# Altium PCB PCB方案验证板  12V5A 60Wascii2.PcbDoc (part 2 of 2)
Units mm, origin at the board's own origin, x right, y up, seen from the top; angles counter-clockwise.
Board outline 99 x 45 mm, 2 copper layers (Top Layer, Bottom Layer); 59 components, 34 nets, 205 pads, 4 vias.
Unrouted connection lines stored in the file: 2.
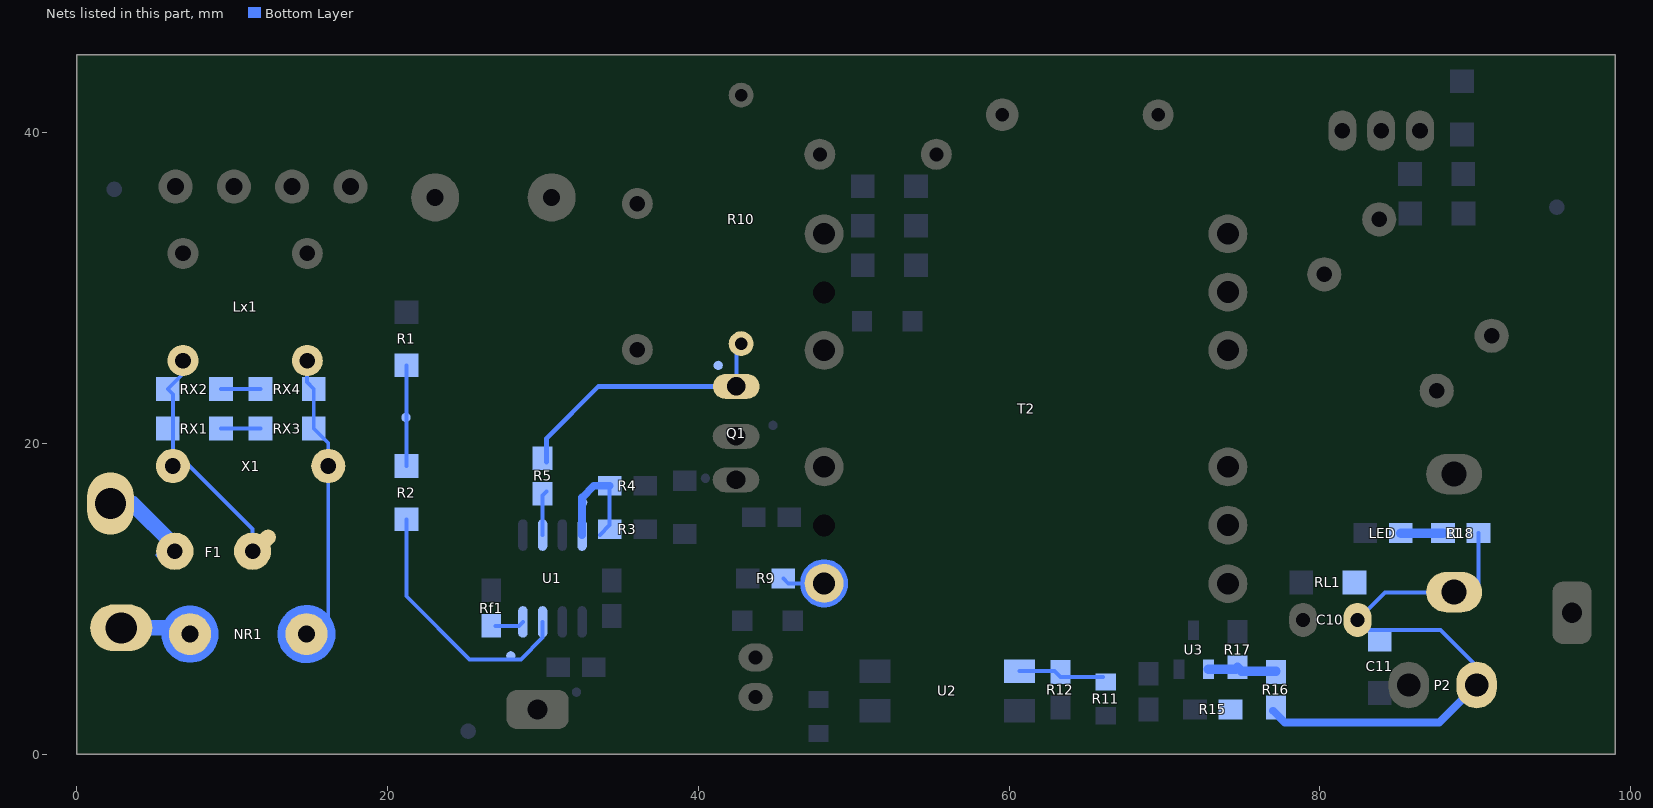
[diagram p2: the nets of this part, all layers, seen from the top]

## Via types
v1: diameter 3.5, hole 3.5, Top Layer to Bottom Layer, 4 vias

## Nets (pads, with @x,y where several pads share a name; then routed paths per layer and width w, separated by ;. In a path a pad name is that pad's centre, name@x,y a point inside that pad or via, vN(x,y) a via of type N, cw(c..) or ccw(c..) an arc to the next point about the centre after c; other vN are vias at no path point) (continued)
NetF1_1: F1.1 F1.@5.753,12.481 pad.1@2.159,16.129 | length 8
  Bottom Layer w0.254: F1.1@5.178,12.827 F1.1@5.753,12.252
  Bottom Layer w1: pad.1@2.159,14.732 pad.1@2.159,16.129 3.556,16.129 6.303,13.382 F1.1@6.303,13.056 F1.1@6.303,12.827
NetF1_2: F1.2 F1.@11.878,13.531 Lx1.3 RX1.1 RX2.1 X1.1 | length 16.1
  Bottom Layer w0.254: Lx1.3@6.795,25.633 6.795,24.448 RX2.1@5.842,23.495 6.176,23.161 X1.1@6.176,18.542 7.239,18.542 11.303,14.478 F1.2@11.303,13.056 F1.@11.303,12.827
NetLED1_1: LED.2 R18.1 | length 2.7
  Bottom Layer w0.6: LED.2@85.2,14.224 R18.1@87.925,14.224
NetNR1_1: Lx1.1 NR1.1 RX3.2 RX4.2 X1.2 | length 26.9
  Bottom Layer w0.254: Lx1.1@14.795,25.633 14.795,23.94 RX4.2@15.24,23.495 RX3.2@15.24,20.955 16.176,20.019 X1.2@16.176,18.542 16.176,7.914
  Bottom Layer w1: 16.148,7.722 ccw(c14.775,7.722) 16.148,7.722
NetNR1_2: NR1.2 pad.1@2.85,8.128 | length 11.2
  Bottom Layer w1: pad.1@2.85,8.128 5.588,8.128 ; NR1.2@8.616,7.722 ccw(c7.275,7.722) NR1.2@8.616,7.722
NetQ1_S: pad.6@41.275,25.019 Q1.S R5.1 R10.2 | length 18.3
  Bottom Layer w0.254: Q1.S@42.438,23.665 42.438,26.309 R10.2@42.799,26.67
  Bottom Layer w0.3: R5.1@30.226,18.796 30.226,20.32 33.571,23.665 Q1.S@42.438,23.665
NetR1_1: pad.6@21.175,21.666 R1.1 R2.2 | length 6.5
  Bottom Layer w0.254: R2.2@21.209,18.542 R1.1@21.209,25.019
NetR2_1: pad.6@27.925,6.325 R2.1 U1.3 | length 17
  Bottom Layer w0.254: R2.1@21.209,15.113 21.209,10.16 25.273,6.096 28.575,6.096 29.972,7.493 U1.3@29.972,8.509
NetR3_2: pad.6@32.55,16.205 R3.2 R4.2 U1.8 | length 7.9
  Bottom Layer w0.254: R3.2@33.655,14.097 34.29,14.732 R4.2@34.29,17.272
  Bottom Layer w0.5: U1.8@32.512,14.097 32.512,16.51 33.274,17.272 R4.2@34.29,17.272
NetR5_2: R5.2 U1.6 | length 2.9
  Bottom Layer w0.254: U1.6@29.972,14.097 29.972,16.637 R5.2@30.226,16.891
NetR9_1: R9.1 T2.6 | length 9.6
  Bottom Layer w0.254: R9.1@45.466,11.303 45.781,10.988 47.041,10.988 T2.6@48.087,10.988 ; T2.6@47.877,10.795 T2.6@48.041,10.959
  Bottom Layer w1: T2.6@47.041,10.988 cw(c48.087,10.988) 49.133,10.988 cw(c48.087,10.988) T2.6@47.041,10.988
NetR11_1: R11.1 R12.2 U2.A | length 5.6
  Bottom Layer w0.254: U2.A@60.657,5.334 62.919,5.334 63.3,4.953 R11.1@66.05,4.953
NetR15_1: R15.1 R16.1 R17.2 U3.R | length 4.5
  Bottom Layer w0.6: U3.R@72.825,5.461 74.573,5.461 R17.2@74.7,5.588 74.954,5.334 R16.1@77.175,5.334
NetRf1_1: Rf1.1 U1.4 | length 1.9
  Bottom Layer w0.254: Rf1.1@26.924,8.255 28.448,8.255 U1.4@28.702,8.509
NetRX1_2: RX1.2 RX3.1 | length 2.5
  Bottom Layer w0.254: RX1.2@9.271,20.955 RX3.1@11.811,20.955
NetRX2_2: RX2.2 RX4.1 | length 2.5
  Bottom Layer w0.254: RX2.2@9.271,23.495 RX4.1@11.811,23.495
VCC: C10.1 C11.1 L1.2 P2.VCC R16.2 R18.2 RL1.2 | length 35.6
  Bottom Layer w0.254: L1.2@89.022,10.8 88.636,10.414 84.201,10.414 C10.1@82.423,8.636 82.423,8.001 87.757,8.001 P2.VCC@90.805,4.953 ; L1.2@90.211,10.795 R18.2@90.211,14.224
  Bottom Layer w0.5: R16.2@76.99,2.783 77.741,2.032 87.681,2.032 P2.VCC@90.094,4.445
pads on no net: RN.1 T2.2 T2.5 U1.5 U2.C
copper on no net: | length 2055.6
  Bottom Layer w0.3: 28.525,10.972 31.446,10.972 31.8,10.618 ; 29.591,16.383 29.591,16.129 29.972,15.748 30.48,16.256 ; 29.591,19.685 30.226,20.32 29.845,19.939 29.845,19.558 ; 29.845,16.383 29.845,14.605 29.972,14.478 ; 29.845,19.304 29.845,19.558 ; 29.972,14.224 30.099,14.351 30.099,16.383 ; 30.226,18.796 30.48,19.05 30.48,20.574 ; 30.226,19.939 29.845,19.558 ; 30.861,5.334 31.75,4.445 ; 31.115,5.334 31.115,5.08 31.305,4.889 ; 32.475,25.527 33.059,25.527 ccw(c33.059,28.593) 35.227,26.425 35.675,26.873 ; 33.075,37.592 33.23,37.592 34.5,36.322 ; 33.125,37.973 33.224,37.973 34.875,36.322 ; 33.3,16.891 33.642,16.891 34.15,16.383 34.198,16.383 34.325,16.256 34.325,16.441 34.775,16.891 ; 33.725,14.986 34.175,15.436 34.325,15.436 ; 33.899,25.527 33.275,25.527 34.642,25.527 ; 34.25,25.629 34.43,25.629 35.675,26.873 ; 34.325,15.621 34.325,15.436 ; 34.775,14.986 34.325,15.436 ; 34.775,25.629 34.775,25.712 35.275,26.213 ; 36.85,25.493 36.85,26.543 36.52,26.873 35.675,26.873 ; 37.125,16.891 37.76,17.526 37.95,17.526 ; 39.725,17.145 39.746,17.145 40,17.399 ; 39.751,23.665 40.175,23.665 41.021,24.511 ; 40.894,24.003 40.556,23.665 40.386,23.665 ; 41.148,23.368 40.851,23.665 40.386,23.665 ; 43.307,22.987 41.275,22.987 40.597,23.665 40.386,23.665 ; 43.425,16.256 43.933,15.748 44.05,15.748 43.434,16.364 43.434,17.018 ; 44.85,11.049 44.85,10.768 44.95,10.668 47.75,10.668 47.877,10.795 ; 45.75,1.706 46.183,1.706 47,0.889 48.225,0.889 ; 46.075,11.303 46.634,11.303 47.65,12.319 48.538,12.319 49.3,11.557 49.3,10.504 48.575,9.779 47.643,9.779 46.5,10.922 ; 46.1,14.732 46.625,14.732 46.625,16.526 ; 47.05,1.143 46.6,1.593 46.6,1.651 ; 47.2,1.27 46.819,1.651 46.6,1.651 ; 47.4,1.27 47.019,1.651 46.6,1.651 ; 47.875,4.445 47.875,4.48 48.475,5.08 ; 47.875,4.953 47.875,3.733 47.925,3.683 ; 48.125,3.683 48.125,5.209 48.25,5.334 ; 48.125,4.953 50.821,4.953 51.075,5.207 ; 49.4,2.413 49.511,2.413 ; 49.975,5.207 50.483,5.715 50.875,5.715 ; 50.175,2.765 50.204,2.794 50.7,2.794 50.446,2.54 49.95,2.54 50.712,3.302 50.85,3.302 ; 51.225,3.175 51.098,3.302 50.4,3.302 49.511,2.413 ; 52.2,2.159 50.325,2.159 50.071,2.413 49.511,2.413 ; 84.808,16.383 87.6,16.383 ; 85.8,17.272 86.175,16.897 86.175,16.891 85.921,16.637 84.9,16.637 ; 86.525,18.415 86.124,18.415 84.6,16.891 84.909,16.891 85.925,17.907 85.925,17.662 84.9,16.637 ; 86.925,19.304 86.713,19.304 84.3,16.891 84.3,15.693 84.507,15.486 92.7,15.486 ; 88.525,25.636 88.525,25.586 89.6,24.511 ; 88.8,25.527 88.99,25.527 89.625,24.892 ; 89.175,25.342 90.042,25.342 90.1,25.4 ; 89.375,24.384 88.2,25.559 88.2,25.654 88.218,25.636 90.85,25.636 ; 89.375,25.4 89.444,25.4 89.825,25.019 ; 84.9,16.637 85.775,17.512 86.475,16.812 86.475,16.637 84.9,16.637
  Bottom Layer w0.33: 63.3,2.667 63.684,2.667 64.573,3.556 67.549,3.556 68.5,4.507 68.5,4.83 68.75,5.08
  Bottom Layer w0.4: 16.637,36.703 17.145,36.195 18.288,36.195 19.05,36.957 ; 27.305,10.033 27.432,10.033 27.94,10.541 ; 33.274,4.718 35.579,2.413 44.625,2.413 51,2.413
  Bottom Layer w0.5: 5.325,36.83 5.325,40.235 9.286,44.196 11,44.196 ; 9.375,42.164 27.824,42.164 29.525,40.463 29.525,36.576 ; 9.85,42.545 27.644,42.545 28.025,42.164 ; 10.6,14.478 10.6,13.656 10.025,13.081 10.025,12.113 10.2,11.938 10.371,11.938 10.625,11.684 11.725,11.684 11.725,11.694 12.35,12.319 ; 10.8,14.478 10.8,13.954 9.8,12.954 9.8,12.255 10.625,11.43 11.873,11.43 12,11.557 12,11.617 12.575,12.192 12.575,14.84 12.175,15.24 ; 12.025,15.621 12.525,15.121 ; 13.425,36.957 13.425,31.742 13.925,31.242 14.9,31.242 ; 14.325,7.188 15.011,6.502 15.787,6.502 17.25,7.965 17.25,18.923 15.625,20.548 15.625,21.209 ; 14.55,19.812 14.55,18.753 15.65,17.653 ; 20.955,15.113 20.955,10.16 25.019,6.096 28.575,6.096 29.972,7.493 29.972,8.255 ; 21.463,10.033 21.463,15.367 ; 21.463,10.287 21.463,9.906 25.273,6.096 ; 21.463,10.541 25.908,6.096 ; 24.075,36.195 24.075,31.671 24.25,31.496 ; 24.384,31.306 24.575,31.115 ; 26.925,43.18 27.276,43.18 28.8,41.656 ; 31.496,10.795 31.623,10.795 33.147,9.271 ; 32.512,9.525 34.544,9.525 34.798,9.271 ; 32.512,14.097 32.512,16.256 ; 32.65,39.624 33.306,39.624 35.55,41.868 ; 32.766,37.592 33.274,37.592 ; 32.893,6.858 33.655,6.096 ; 32.893,7.62 33.782,8.509 ; 33.274,4.718 33.274,5.588 ; 33.275,39.878 33.275,39.91 35.275,41.91 ; 33.375,38.1 33.375,39.693 36.1,42.418 ; 33.401,11.874 34.734,11.874 ; 33.528,5.715 34.29,5.715 36.322,3.683 44.069,3.683 ; 33.528,6.223 34.036,6.223 36.195,4.064 ; 33.528,17.272 34.29,17.272 ; 33.625,42.545 33.625,42.817 34.75,43.942 58.42,43.942 60.579,41.783 ; 33.675,35.832 33.675,40.141 ; 33.782,5.715 33.909,5.715 35.56,4.064 ; 34.163,10.922 33.21,11.874 33.147,11.874 33.465,11.874 34.29,11.049 ; 34.671,10.922 36.068,10.922 40.513,6.477 43.434,6.477 ; 34.875,41.783 57.912,41.783 58.575,41.12 ; 35.306,4.064 44.196,4.064 ; 37.2,30.226 37.361,30.226 ; 39.497,17.907 41.021,17.907 41.402,18.288 43.307,18.288 43.688,17.907 43.688,17.272 43.434,17.018 41.402,17.018 40.832,17.588 40.64,17.588 ; 42.164,6.477 42.291,6.477 43.18,5.588 ; 43.942,3.302 35.687,3.302 33.401,5.588 33.274,5.588 ; 44.069,19.812 41.402,19.812 41.021,20.193 41.021,20.828 41.275,21.082 44.704,21.082 ; 44.323,3.683 35.56,3.683 33.655,5.588 33.274,5.588 ; 44.831,5.969 46.482,7.62 46.482,8.509 ; 44.831,6.604 45.72,7.493 45.72,8.763 ; 45.085,6.477 45.974,7.366 45.974,8.382 ; 45.276,7.048 43.624,7.048 42.926,6.35 42.926,6.223 42.926,5.842 43.434,5.334 44.831,5.334 46.609,7.112 46.609,8.382 ; 47.675,3.882 47.675,4.934 48.075,5.334 51.357,5.334 ; 48.044,32.512 48.425,32.893 ; 49.911,19.685 60.579,30.353 60.579,40.767 ; 53.425,27.229 53.476,27.178 ; 55.25,39.522 55.232,39.522 53.2,37.49 53.2,27.454 53.476,27.178 ; 55.875,38.786 55.875,38.034 54.925,37.084 54.925,27.578 54.525,27.178 53.476,27.178 ; 57.785,43.561 58.801,43.561 60.579,41.783 ; 59.817,28.956 60.579,29.718 60.579,30.861 ; 59.817,40.005 60.579,40.767 ; 60.198,41.275 60.325,41.148 60.325,30.099 ; 61.1,5.334 63.254,5.334 63.3,5.288 ; 61.2,5.08 63.45,5.08 66.371,5.08 66.625,4.826 ; 61.225,2.667 63.3,2.667 ; 61.25,3.048 63.523,3.048 63.65,2.921 ; 61.5,2.286 61.881,2.667 62.2,2.667 ; 62.325,3.048 62.706,3.429 62.875,3.429 ; 64.725,5.08 65.115,5.08 65.75,4.445 ; 66.4,2.667 66.4,1.651 67.035,1.016 67.075,1.016 ; 66.425,2.261 66.507,2.261 67.625,1.143 ; 66.425,2.388 66.425,2.017 67.35,1.092 ; 66.625,2.54 66.625,1.426 66.7,1.351 ; 67.8,1.016 66.75,1.016 65.8,1.966 65.8,2.54 65.575,2.315 65.575,1.905 66.337,1.143 66.4,1.143 66.654,0.889 91.8,0.889 92.65,1.739 ; 68.85,3.302 69.567,3.302 70.075,2.794 69.806,2.794 69.425,2.413 ; 68.975,2.875 71.964,2.875 ; 69.3,5.461 70.925,5.461 70.087,5.461 69.325,4.699 ; 70.525,2.875 70.94,2.875 ; 71.35,3.175 71.05,2.875 70.94,2.875 ; 71.825,7.747 74.573,7.747 74.7,7.874 ; 73.275,7.747 73.794,7.747 74.175,7.366 ; 73.4,5.461 73.908,5.969 74.475,5.969 ; 74.25,2.875 74.2,2.925 74.2,5.334 74.2,5.124 ; 74.5,4.064 73.484,5.08 72.975,5.08 ; 74.5,4.318 73.738,5.08 72.975,5.08 ; 74.625,4.699 74.2,5.124 ; 74.65,4.953 74.65,3.777 74.175,3.302 74.725,3.852 74.725,5.207 ; 75,7.493 78.373,7.493 78.5,7.62 ; 76.2,7.747 78.373,7.747 78.5,7.874 ; 76.5,7.874 77.973,7.874 78.1,8.001 ; 76.767,7.874 77.299,7.874 78.95,6.223 ; 76.99,2.783 76.99,2.367 77.325,2.032 79.3,2.032 ; 77.425,3.175 77.434,3.175 78.45,2.159 ; 77.475,2.794 77.475,2.659 77.975,2.159 ; 85,44.196 89.421,44.196 89.675,43.942 89.294,44.323 85.725,44.323 ; 86.725,41.148 88.503,42.926 88.975,42.926 ; 86.975,41.91 88.245,43.18 88.625,43.18 ; 87.125,42.494 89.573,42.494 89.7,42.621 89.7,43.717 89.45,43.967 ; 87.25,42.24 89.598,42.24 89.725,42.367 ; 87.475,42.266 89.623,42.266 89.725,42.367 ; 87.775,44.196 87.877,44.298 89.675,44.298 89.98,43.993 90.025,43.993 90.075,43.943 90.075,42.723 89.725,42.373 89.725,42.367 ; 88.25,2.601 88.25,5.698 88.775,6.223 ; 88.4,2.794 90.075,2.794 ; 89.725,42.499 89.725,42.367 ; 91.275,15.824 91.453,15.824 93.028,14.249 ; 92.425,15.935 92.425,15.674 93.875,14.224 ; 92.65,5.563 92.65,6.353 ; 92.65,14.959 92.65,1.739 ; 92.825,14.453 93.028,14.249 ; 93.2,16.187 93.2,14.73 ; 93.325,14.605 93.2,14.73 ; 93.65,15.494 93.65,15.666 94.875,16.891 ; 93.65,16.637 93.65,14.249 93.675,14.224 ; 93.7,15.113 93.7,15.174 95.925,17.399 ; 93.9,14.732 96.694,17.526 96.725,17.526 ; 94.375,17.526 93.875,17.026 93.875,14.097 ; 97.1,12.065 97.6,12.565 97.6,19.711 97.65,19.761 ; 97.58,17.802 93.875,14.097 ; 12.35,12.319 12.35,13.541 12.525,13.716 12.525,15.121 ; 12.35,12.319 12.525,12.494 12.525,15.121 ; 60.579,40.767 60.579,41.783 ; 70.94,2.875 71.275,2.54 70.94,2.875 ; 72.975,5.08 74.156,5.08 74.2,5.124 ; 92.65,1.739 92.65,1.76 93.1,2.21 93.1,14.63 93.2,14.73 ; 93.028,14.249 93.275,14.249 92.65,13.624 92.65,12.954 93.793,14.097 93.875,14.097
  Bottom Layer w0.56: 34.775,25.629 34.775,25.823
  Bottom Layer w0.6: 5.475,32.69 5.475,31.722 5.625,31.572 5.696,31.572 5.925,31.344 8.732,31.344 9.875,32.487 ; 13.65,25.298 13.65,26.726 13.975,27.051 15.749,27.051 15.8,27 15.845,27 16.175,26.67 16.175,18.919 15.925,18.669 ; 25.273,6.477 28.829,6.477 29.972,7.62 ; 26.543,10.16 26.543,12.446 ; 26.875,23.393 28.628,25.146 35.725,25.146 ; 26.924,11.557 26.924,23.876 28.575,25.527 36.322,25.527 ; 27.175,24.282 27.175,11.784 27.25,11.709 ; 28.575,10.541 26.924,10.541 27.178,10.795 28.829,10.795 ; 28.575,10.922 26.543,12.954 ; 30.734,5.969 31.242,6.477 31.242,6.604 ; 31.115,5.334 31.242,5.461 31.242,8.509 ; 32.512,9.525 31.496,10.541 27.94,10.541 26.543,11.938 26.543,12.954 ; 33.909,14.478 33.972,14.414 ; 34.29,14.732 34.29,17.272 ; 34.775,25.629 28.325,25.629 26.543,23.847 26.543,12.954 ; 36.576,14.478 38.8,14.478 ; 36.576,17.526 38.8,17.526 ; 39.116,17.588 42.483,17.588 ; 41.892,6.368 42.799,5.461 44.577,5.461 ; 42.291,6.477 42.799,6.985 44.704,6.985 ; 42.799,17.145 43.053,17.145 ; 45.085,11.557 47.625,11.557 48.26,10.922 ; 45.466,11.303 47.697,11.303 ; 45.466,15.748 46.101,16.383 46.101,16.501 ; 45.593,10.922 47.625,10.922 47.752,11.049 ; 45.847,11.557 47.244,11.557 47.625,11.938 48.641,11.938 49.022,11.557 49.022,10.541 48.514,10.033 47.818,10.033 46.863,10.988 ; 45.847,15.24 45.847,16.247 47.507,17.907 ; 46.228,14.986 46.228,16.129 47.752,17.653 ; 46.35,16.637 46.502,16.789 48.075,16.789 49.325,18.039 49.325,19.099 ; 46.95,17.221 46.95,18.672 47.125,18.847 47.125,18.933 47.775,19.583 49.374,19.583 49.425,19.634 ; 47.075,16.967 47.869,16.967 48.25,17.348 ; 47.2,26.975 48.267,28.042 50.825,28.042 ; 47.752,26.797 48.81,26.797 49.75,27.737 48.35,27.737 48.719,27.737 49.125,27.33 ; 48.089,27.864 48.521,28.296 50.8,28.296 50.825,28.271 50.825,27.711 ; 87.675,6.858 82.443,6.858 81.325,7.976 81.325,12.224 81.75,12.649 89.822,12.649 90,12.471
  Bottom Layer w0.61: 32.512,14.097 32.512,16.51 33.274,17.272 34.29,17.272 ; 33.02,16.891 34.417,16.891
  Bottom Layer w0.8: 5.842,38.862 5.842,37.846 5.461,37.465 5.461,36.576 5.842,36.195 6.477,36.195 7.112,36.83 7.112,39.624 ; 7.112,32.131 8.509,32.131 ; 7.371,31.882 10.033,34.544 ; 8.95,32.842 5.537,32.842 5.588,32.893 5.588,32.004 5.715,32.004 6.096,31.623 8.89,31.623 10.414,33.147 10.414,36.83 ; 13.783,33.545 13.783,32.064 14.478,31.369 15.494,31.369 16.129,32.004 16.129,32.766 15.621,33.274 14.859,33.274 14.16,33.972 14.16,36.639
  Bottom Layer w1: 1.905,17.018 1.905,16.764 6.096,12.573 ; 2.54,14.732 2.54,14.986 ; 2.54,15.367 2.667,15.367 ; 2.638,15.367 1.905,15.367 2.867,15.367 5.753,12.481 ; 2.921,7.62 2.794,7.493 2.667,7.493 2.921,7.239 5.35,7.239 ; 3.325,7.214 4.895,7.214 ; 3.429,14.224 1.651,14.224 0.762,15.113 0.762,17.018 1.651,17.907 2.286,17.907 6.54,13.652 ; 4.65,8.28 3.863,9.068 1.75,9.068 1.1,8.418 1.1,7.696 1.989,6.807 5.6,6.807 ; 5.675,12.559 5.915,12.319 6.675,12.319 7.175,12.819 7.175,13.64 6.438,14.376 5.775,14.376 ; 9.025,31.902 10.675,33.552 10.675,37.135 ; 9.025,33.096 9.7,33.771 9.7,37.186 ; 9.575,33.147 9.575,36.982 ; 13.425,36.957 13.425,32.1 13.8,31.725 ; 13.75,8.484 16.125,10.859 16.125,11.735 ; 14.15,35.052 14.15,34.396 15.45,33.096 ; 14.45,33.147 14.5,33.197 14.5,36.627 ; 14.795,24.765 14.478,24.765 13.843,25.4 13.843,26.035 14.605,26.797 15.24,26.797 15.621,26.416 15.621,22.479 ; 17.563,37.211 18.3,36.474 22.333,36.474 23.054,35.754 ; 19.75,36.728 20.37,36.728 22.3,34.798 ; 20.574,36.654 20.623,36.654 22.86,34.417 23.749,34.417 ; 21.209,18.542 21.209,25.019 ; 21.209,28.448 21.209,33.909 23.054,35.754 ; 22.294,34.163 22.675,33.782 ; 23.054,35.832 23.054,35.754 ; 23.9,33.274 23.9,32.776 26.45,30.226 ; 24.15,31.496 24.15,37.338 ; 27.05,12.116 27.05,12.045 28.3,10.795 ; 29.591,41.529 29.591,34.925 29.972,34.544 32.258,34.544 ; 30.861,37.338 32.258,35.941 32.258,34.925 ; 33.125,35.611 33.65,36.136 33.65,40.894 ; 33.224,37.973 33.224,37.763 35.275,35.712 ; 33.225,39.167 36.4,42.342 36.6,42.342 ; 33.274,37.338 33.274,36.83 33.655,36.449 ; 34.85,41.351 43.008,41.351 44.1,42.443 ; 35.814,36.322 36.449,36.322 36.957,35.814 36.957,35.052 36.576,34.671 ; 39.625,43.053 39.744,43.053 ; 41.402,25.654 42.672,26.924 43.053,26.924 43.561,26.416 43.561,23.622 43.307,23.368 41.91,23.368 41.148,24.13 41.148,25.4 42.291,26.543 ; 42.423,20.452 43.82,20.452 48.087,24.719 ; 42.876,8.839 42.876,10.998 ; 42.95,30.378 42.95,30.631 49.276,36.957 ; 43.075,29.947 43.075,30.134 49.258,36.317 ; 44.069,20.066 50.527,26.524 50.527,27.864 49.46,26.797 47.752,26.797 47.498,26.543 47.371,26.543 47.371,25.527 47.752,25.146 ; 44.323,21.082 48.514,25.273 ; 45.775,31.877 49.543,31.877 49.975,31.445 ; 46.15,31.267 46.353,31.064 50.85,31.064 50.925,31.139 50.925,37.795 49.477,39.243 47.825,39.243 ; 46.55,31.293 50.47,31.293 50.546,31.369 ; 47.3,38.71 47.3,34.386 49.225,32.461 ; 47.371,24.511 47.371,26.035 ; 47.498,10.795 47.879,11.176 ; 47.55,32.258 48.676,32.258 ; 48.05,38.481 48.05,36.062 48.4,35.712 ; 48.4,34.798 49.3,35.698 49.3,36.576 ; 48.55,38.1 48.55,35.86 48.85,35.56 ; 48.591,38.608 48.591,38.531 50.571,36.551 ; 49,38.913 49,38.586 50.375,37.211 ; 49.494,31.369 49.875,31.75 ; 53.625,28.55 54.375,29.3 54.375,36.703 55.525,37.853 55.525,38.532 ; 69.469,38.862 69.469,40.132 68.834,40.767 68.834,41.656 69.215,42.037 69.977,42.037 70.358,41.656 70.358,40.513 69.723,39.878 ; 69.65,25.4 69.65,24.201 73.15,20.701 ; 71.175,21.111 76.127,21.111 76.225,21.209 ; 71.775,21.717 76.098,21.717 76.225,21.59 ; 72.3,20.447 75.475,20.447 ; 73.9,20.752 74.189,20.752 78.075,24.638 ; 74.087,18.488 74.087,10.043 73.95,9.906 75.123,9.906 75.25,10.033 75.267,10.033 75.775,10.541 75.775,19.006 76.2,19.431 ; 74.2,28.448 74.2,31.629 ; 74.425,18.034 74.916,18.034 79.475,22.593 79.475,30.353 ; 74.55,33.02 74.55,33.076 81.225,39.751 ; 74.725,16.383 74.725,17.048 79.629,21.952 79.629,30.861 ; 77.575,22.987 77.575,30.3 79.025,31.75 ; 77.65,12.065 77.65,15.038 85.475,22.863 85.475,23.241 ; 78.375,8.722 79.075,9.422 79.075,14.732 ; 78.45,16.84 78.47,16.84 81.975,20.345 ; 78.5,7.874 77.65,8.724 77.65,17.822 77.65,17.882 80.875,21.107 86.25,21.107 86.275,21.082 ; 78.5,10.16 78.5,9.003 83.693,3.81 ; 78.625,8.89 79.007,8.89 ; 78.675,28.702 78.807,28.702 cw(c78.807,25.636) 80.975,27.804 ; 78.825,12.319 81.365,14.859 81.6,14.859 ; 78.875,11.811 81.034,13.97 81.9,13.97 ; 79.075,23.95 79.075,30.434 79.375,30.734 ; 79.075,30.023 cw(c79.075,29.158) 79.687,29.769 82.075,27.381 ; 79.175,8.382 79.35,8.557 79.35,14.859 ; 79.2,13.97 79.327,14.097 80.125,14.097 82.787,14.097 83.175,14.485 83.175,17.526 ; 79.3,19.533 79.327,19.533 82.4,22.606 86.974,22.606 87.025,22.657 ; 79.35,29.718 81.275,29.718 ; 79.525,29.56 80.284,30.319 80.284,30.902 ; 79.617,28.286 83.979,23.924 85.728,23.924 ; 79.8,29.466 79.8,30.099 ; 80,38.862 81.646,38.862 81.9,39.116 81.9,42.291 ; 80.6,14.732 82.421,14.732 82.5,14.653 82.5,17.653 ; 80.899,40.767 80.899,41.327 82.625,43.053 ; 80.9,27.965 cw(c80.9,27.815) 81.05,27.815 ; 80.9,28.626 80.9,25.704 82.55,24.054 85.598,24.054 85.728,23.924 ; 81.475,41.275 81.482,41.275 82.625,42.418 ; 81.55,16.52 81.55,15.588 82.025,15.113 ; 81.675,5.588 85.986,5.588 ; 81.675,42.545 85.998,42.545 86.125,42.418 ; 81.75,9.652 81.75,7.914 82.552,7.112 87.65,7.112 ; 81.8,12.065 90.438,12.065 90.825,11.678 90.825,10.279 ; 81.925,28.575 81.925,26.989 85.8,23.114 85.8,22.602 ; 82.1,21.615 84.57,21.615 84.9,21.946 ; 82.35,7.493 82.442,7.493 82.95,6.985 88.425,6.985 ; 82.598,28.321 82.725,28.448 ; 82.925,9.398 89.944,9.398 ; 82.95,20.574 81.371,20.574 78.45,17.653 78.45,14.547 78,14.097 78,15.731 80.425,18.156 80.425,19.558 80.95,20.083 80.95,22.504 81.048,22.602 85.8,22.602 ; 83.025,9.779 90.325,9.779 90.825,10.279 ; 83.66,4.237 86.275,4.237 ; 83.725,19.844 83.775,19.894 ; 83.95,8.001 89.395,8.001 91.3,6.096 91.3,3.131 91.217,3.048 89.394,3.048 88.85,3.592 88.85,5.969 ; 84.45,20.574 84.625,20.749 ; 84.725,24.054 80.9,27.879 80.9,24.151 81.127,23.924 85.728,23.924 ; 84.8,42.926 84.876,42.926 86.4,41.402 ; 85.068,24.224 86,23.292 ; 85.1,21.609 85.5,21.209 ; 85.538,22.377 ccw(c85.538,23.114) 86.275,23.114 ; 86.05,23.688 86.05,22.352 85.8,22.602 ; 86.097,23.825 86.199,23.724 86.275,23.647 ; 86.9,10.795 87.785,10.795 90.325,13.335 ; 87.277,7.366 87.277,6.889 89.975,4.191 ; 89.7,11.176 90.025,11.501 90.025,14.097 ; 90.211,10.795 90.211,13.935 90.475,14.199 90.865,14.199 91.125,13.939 91.125,10.579 89.944,9.398 ; 92.75,10.668 92.75,11.121 94.075,12.446 ; 92.775,24.206 93.125,24.556 93.125,28.854 ; 92.8,9.957 95.125,12.282 95.125,12.395 ; 89.944,9.398 90.825,10.279 ; 36.686,26.035 ccw(c36.068,26.035) 36.686,26.035
  Bottom Layer w1.5: 47.812,38.421 50.546,35.687 ; 48.006,32.893 50.038,32.893 ; 48.387,33.147 48.768,33.147 ; 48.508,33.909 48.895,33.909 49.911,34.925 49.911,35.941 ; 48.895,18.669 59.563,29.337 59.563,41.275 ; 49.149,32.639 49.784,32.639 50.546,31.877 ; 53.975,29.162 53.975,37.271 55.312,38.608 ; 56.515,42.799 56.896,42.799 59.436,40.259 ; 69.596,41.148 69.596,22.69 74.125,18.161
  Bottom Layer w2: 5.969,24.511 5.969,26.035 6.604,26.67 6.985,26.67 7.366,26.289 7.366,25.781 6.223,24.638 ; 6.795,25.633 6.795,25.591 5.969,24.765 5.969,18.288 6.477,17.78 8.763,17.78 11.303,15.24 11.303,12.827 ; 14.739,6.738 16.176,8.175 16.176,18.796 15.24,19.732 15.24,25.146 ; 30.734,35.56 31.369,35.56 32.766,36.957 32.766,40.894 34.671,42.799 58.039,42.799 59.563,41.275 ; 32.766,36.068 32.766,38.1 ; 73.533,25.019 73.533,35.814 81.28,43.561 85.725,43.561 86.614,42.672 86.614,39.624 ; 73.533,25.4 73.533,35.052 81.407,42.926 ; 73.787,24.765 74.295,24.765 74.676,25.146 74.676,34.417 80.264,40.005 ; 74.087,10.963 74.087,18.485 ; 74.087,18.488 74.212,18.488 ; 74.087,25.988 74.087,33.488 74.087,35.479 78.74,40.132 81.153,40.132 80.899,40.386 80.899,42.418 81.915,43.434 85.344,43.434 86.614,42.164 86.614,40.259 ; 74.925,17.849 74.925,11.303 74.036,10.414 73.5,10.414 73.5,18.665 78.83,23.995 ; 78.15,14.27 80.517,16.637 80.925,16.637 ; 78.375,8.722 78.375,14.494 87.493,23.612 87.8,23.612 ; 78.4,23.565 78.4,30.307 79.335,31.242 80.302,31.242 80.725,30.819 ; 78.923,7.339 82.452,3.81 85.979,3.81 ; 78.923,13.893 87.523,22.493 87.523,23.388 ; 79.325,7.206 82.213,4.318 86.175,4.318 ; 79.35,14.32 80,14.97 ; 80.391,31.008 80.284,30.902 80.51,30.902 87.8,23.612 ; 81.275,29.718 87.381,23.612 87.8,23.612 ; 82.175,8.509 82.175,11.43 ; 82.3,8.124 82.3,9.941 83.535,11.176 89.388,11.176 90.15,10.414 88.636,10.414 83.854,10.414 82.423,8.983 82.423,8.636 ; 82.423,8.045 82.423,8.636 ; 82.93,8.636 82.423,8.636 ; 85.45,4.318 86.194,4.318 ; 86.475,21.971 86.925,22.421 86.925,24.13 ; 88.651,7.112 90.348,5.415 90.348,3.81 ; 89.475,11.089 89.906,11.089 90.2,10.795
  other v1: 95.725,3.302 3.3,3.404 93.5,39.573 3.4,41.707

## Keep-outs
Keep-Out Layer:
  the board outline again, w0.254

## Other copper
Bottom Layer:
  rectangle net NetD1_+: 42.8,14.732 43.75,17.526
  rectangle net GND1: 29.75,34.925 36.375,36.703
  rectangle net GND: 72.85,10.287 74.95,19.436
  rectangle net NetC7_2: 84.925,16.637 86.475,17.272
  rectangle net GND: 77.875,7.206 79.325,14.351
  rectangle net GND: 73.075,10.287 74.95,19.431
  rectangle net GND: 77.65,7.493 79.225,15.038
  rectangle net NetC7_2: 93.025,16.383 95.425,17.78
  rectangle net NetC9_1: 68.325,4.826 71.225,5.969
  rectangle net NetR15_1: 74.025,2.54 75.025,5.588
  rectangle net GND: 74.975,7.206 79.325,8.255
  rectangle net NetRX2_2: 8.636,22.733 12.446,24.257
  rectangle net NetRX1_2: 8.636,20.193 12.192,21.717
  rectangle net NetQ1_S: 41.402,23.876 43.434,26.162
  rectangle net GND1: 32.512,8.128 34.925,9.525
  rectangle net GND1: 32.512,5.08 33.274,8.128
  rectangle net NetRf1_1: 25.781,7.493 28.829,9.017
  rectangle net NetC2_1: 43.624,5.461 44.958,7.048
  rectangle net NetC6_1: 85.998,42.545 89.925,44.069
  rectangle net NetC6_2: 88.375,33.909 90.075,40.767
  rectangle net NetC7_2: 83.15,34.036 86.6,38.1
  rectangle net NetC7_2: 83.325,34.036 86.425,37.719
  rectangle net NetC7_2: 83.75,30.226 85.4,34.163
  rectangle net NetC7_2: 84.75,28.956 90.575,31.75
  rectangle net NetC7_2: 89.475,26.599 91.275,29.464
  rectangle net NetC7_2: 91.525,17.018 97.075,26.416
  rectangle net NetC7_2: 95.75,25.146 97.175,27.051
  rectangle net NetC7_2: 88.85,17.018 92.45,19.939
  rectangle net NetC7_2: 86.925,28.448 94.75,33.147
  rectangle net NetC7_2: 90.275,18.212 97.55,25.222
  rectangle net VCC: 82.3,7.798 84.3,9.941
  rectangle net VCC: 81.7,7.925 82.875,11.405
  rectangle net NetC1_1: 21.6,34.849 23.925,37.719
  rectangle net NetC2_1: 45.425,7.239 46.875,9.22
  rectangle net NetC5_2: 53.2,27.28 54.85,31.445
  rectangle net GND: 78.225,6.68 79.775,10.058
  rectangle net GND: 78.55,6.655 80.175,13.233
  rectangle net NetNR1_2: 1.6,7.772 3.85,9.576
  rectangle net GND1: 5.1,35.204 7.525,37.694
  rectangle net NetC1_1: 16.4,35.204 24.2,37.846
  rectangle net NetDB1_N: 9.025,33.757 11.25,37.922
  rectangle net NetDB1_L: 12.75,31.013 15,37.77
  rectangle net NetNR1_2: 2.45,6.274 7.775,9.195
  rectangle net NetC1_1: 48.65,30.785 51.4,37.084
  rectangle net NetC5_2: 53.2,27.127 54.775,37.49
  rectangle: 80.975,24.155 82.448,25.629
  rectangle net NetC7_2: 84.325,15.494 92.425,16.916
  rectangle net NetC7_2: 93.1,11.811 97.4,16.713
  rectangle net NetC7_2: 94.875,15.672 97.55,18.567
  rectangle net GND1: 29.75,34.544 36.461,36.703
  rectangle net NetC9_2: 69.025,2.261 72.05,3.505

## Silkscreen, mask and mechanical layers (free items; w line width, h text height)
Top Overlay:
  circle w0.254: c3.3,3.404 r3
  circle w0.254: c3.3,3.404 r1.75
  circle w0.254: c3.4,41.707 r1.75
  circle w0.254: c3.4,41.707 r3
  circle w0.254: c95.725,3.302 r1.75
  circle w0.254: c95.725,3.302 r3
  circle w0.254: c93.5,39.573 r1.75
  circle w0.254: c93.5,39.573 r3
  lines w0.254: 27.2,0 39.751,0 ; 78.553,43 97,43 ; 39.751,0 39.751,44.831 37.751,44.831 37.751,2.032 27.15,2.032 27.15,0 39.751,0 ; 97,43 97,6.782 99,6.782 99,45 72.517,45 72.517,43 97,43
  lines w0.8: 36.068,26.035 36.068,35.433
  text "L" at 1.35,19.761 h1.5 r270
  text "AC" at 1.2,13.564 h1 r270
  text "N" at 1.35,11.201 h1.5 r270
  text "V-" at 84.15,1.118 h1
  text "DC" at 87.025,1.118 h1
  text "V+" at 89.875,1.118 h1
Bottom Overlay:
  circle w0.254: c25.175,1.473 r1.086
  circle w0.254: c95.25,35.204 r1.086
  circle w0.254: c2.4,36.347 r1.086
Bottom Solder:
  circle w0.5: c25.175,1.473 r0.75
  circle w0.5: c95.25,35.204 r0.75
  circle w0.5: c2.4,36.347 r0.75
  lines w1: 74.087,18.488 74.149,18.488 ; 78.923,8.636 78.923,14.274 78.923,14.274 ; 83.82,34.417 83.947,34.544 83.947,40.132 ; 86.375,40.204 86.447,40.132 ; 89.024,43.155 89.1,43.231
  text "DESIGN:ZYC" at 25.15,42.393 h1.5
Mechanical 1:
  circle w0.2: c61.575,22.479 r1
  circle w0.2: c61.575,25.908 r1
  circle w0.2: c63.65,28.448 r1
  circle w0.2: c65.15,31.242 r1
  circle w0.2: c65.275,34.671 r1
  circle w0.2: c61.575,19.367 r1
  circle w0.2: c61.575,10.033 r1
  circle w0.2: c61.575,13.144 r1
  circle w0.2: c61.575,16.256 r1

## Text inside footprints (layer, text, board x,y; h text height)
C2: Top Overlay "+" at 42.418,5.41 h1 r90
C10: Top Overlay "+" at 81.742,10.262 h1.52
D1: Bottom Overlay "-" at 37.641,13.587 h1 r270